# Altium PCB Light Sensor Prototype.PcbDoc
Units mm, origin at the board's own origin, x right, y up, seen from the top; angles counter-clockwise.
Board outline 39.25 x 39.25 mm, 2 copper layers (Top Layer, Bottom Layer); 41 components, 35 nets, 224 pads, 62 vias.
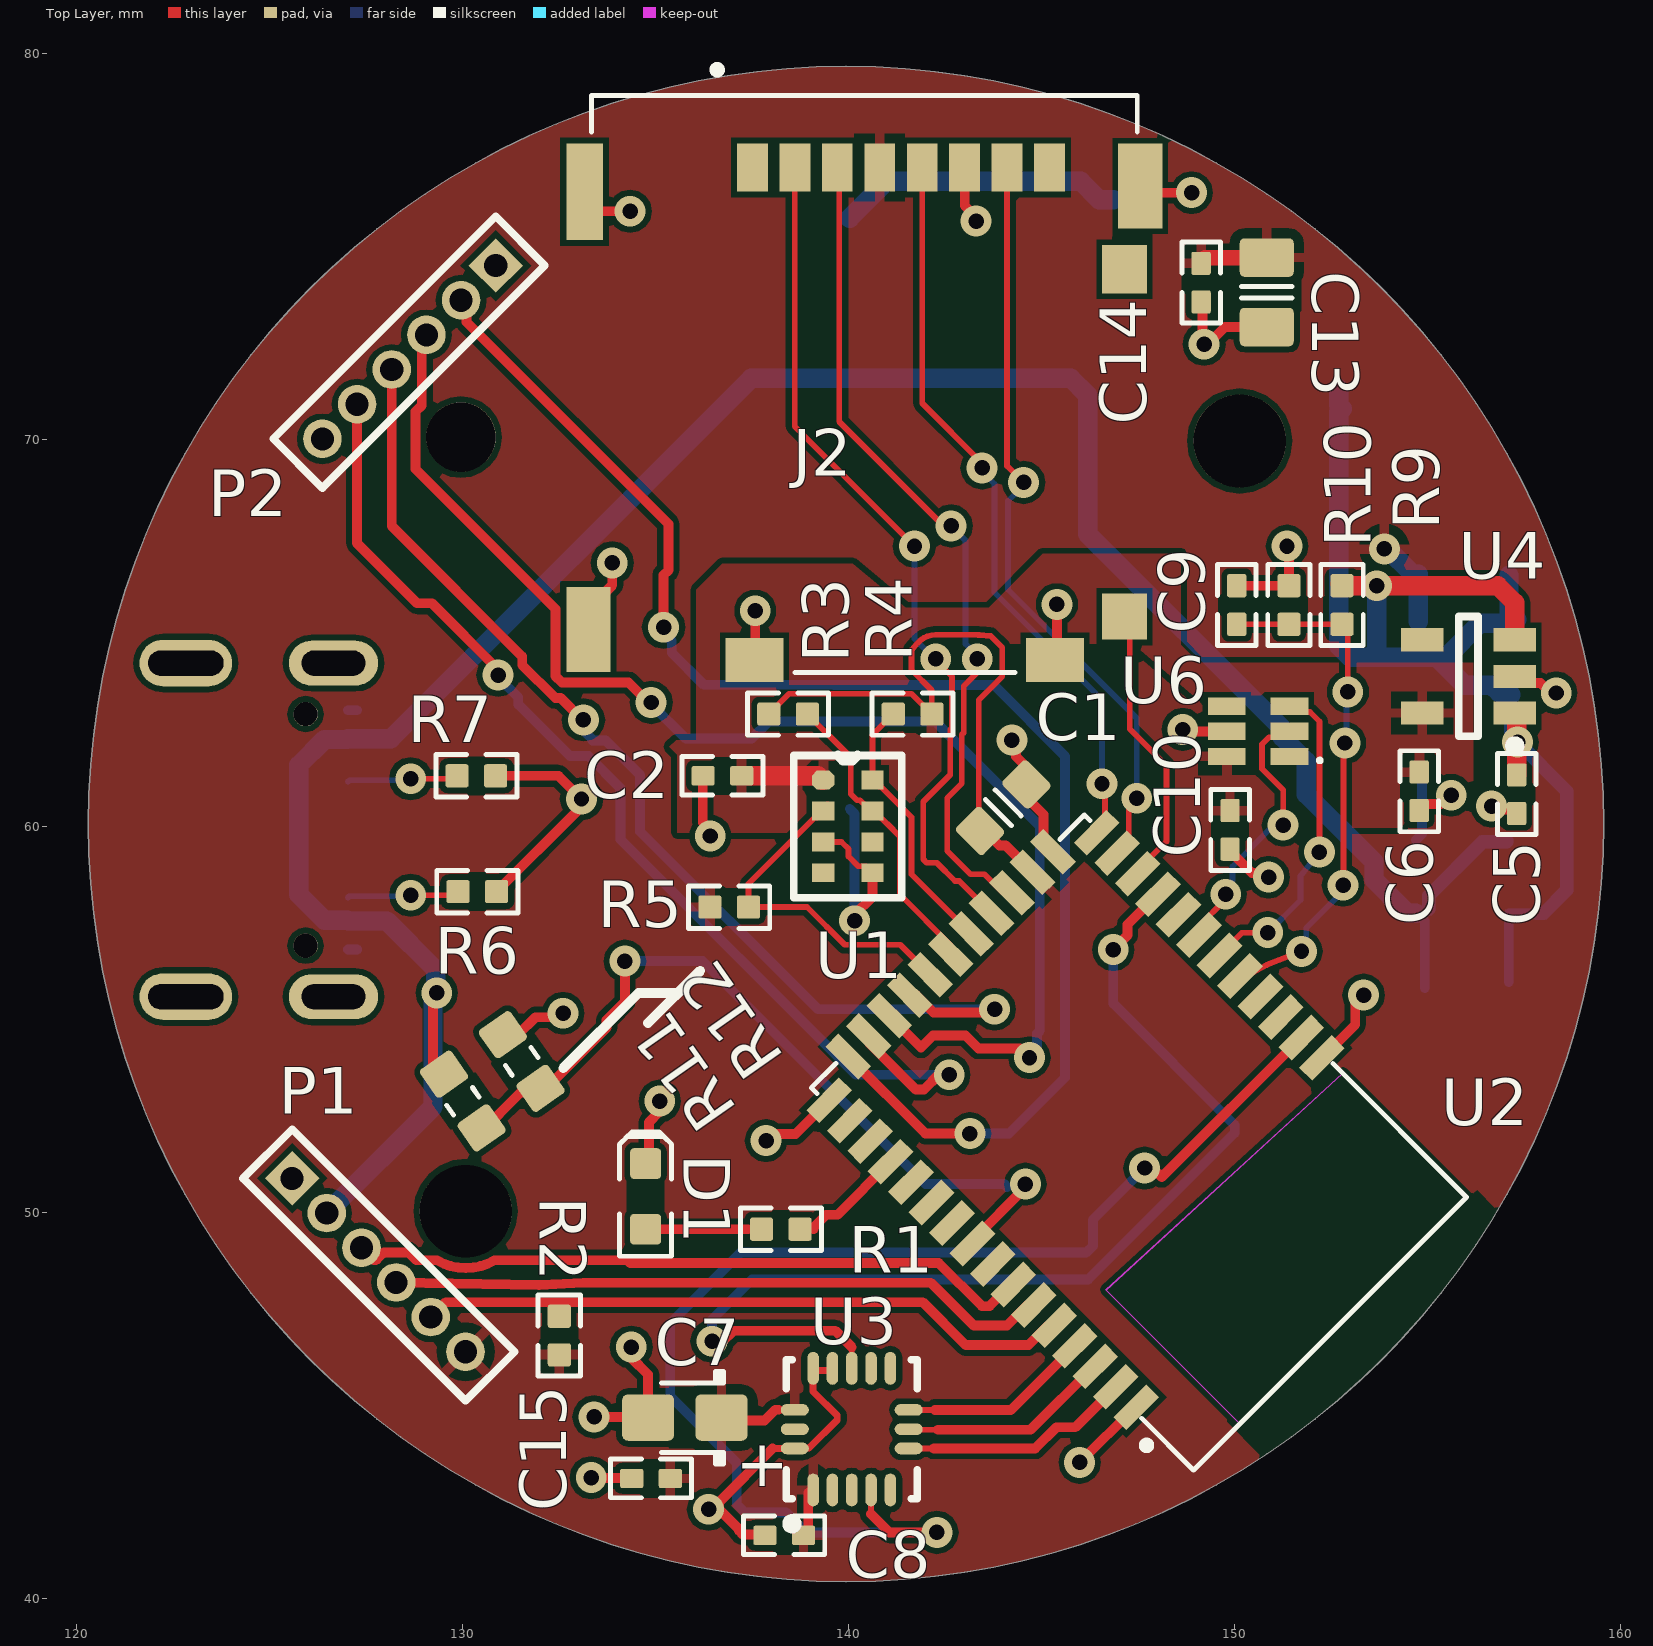
[diagram p0: Top Layer view]
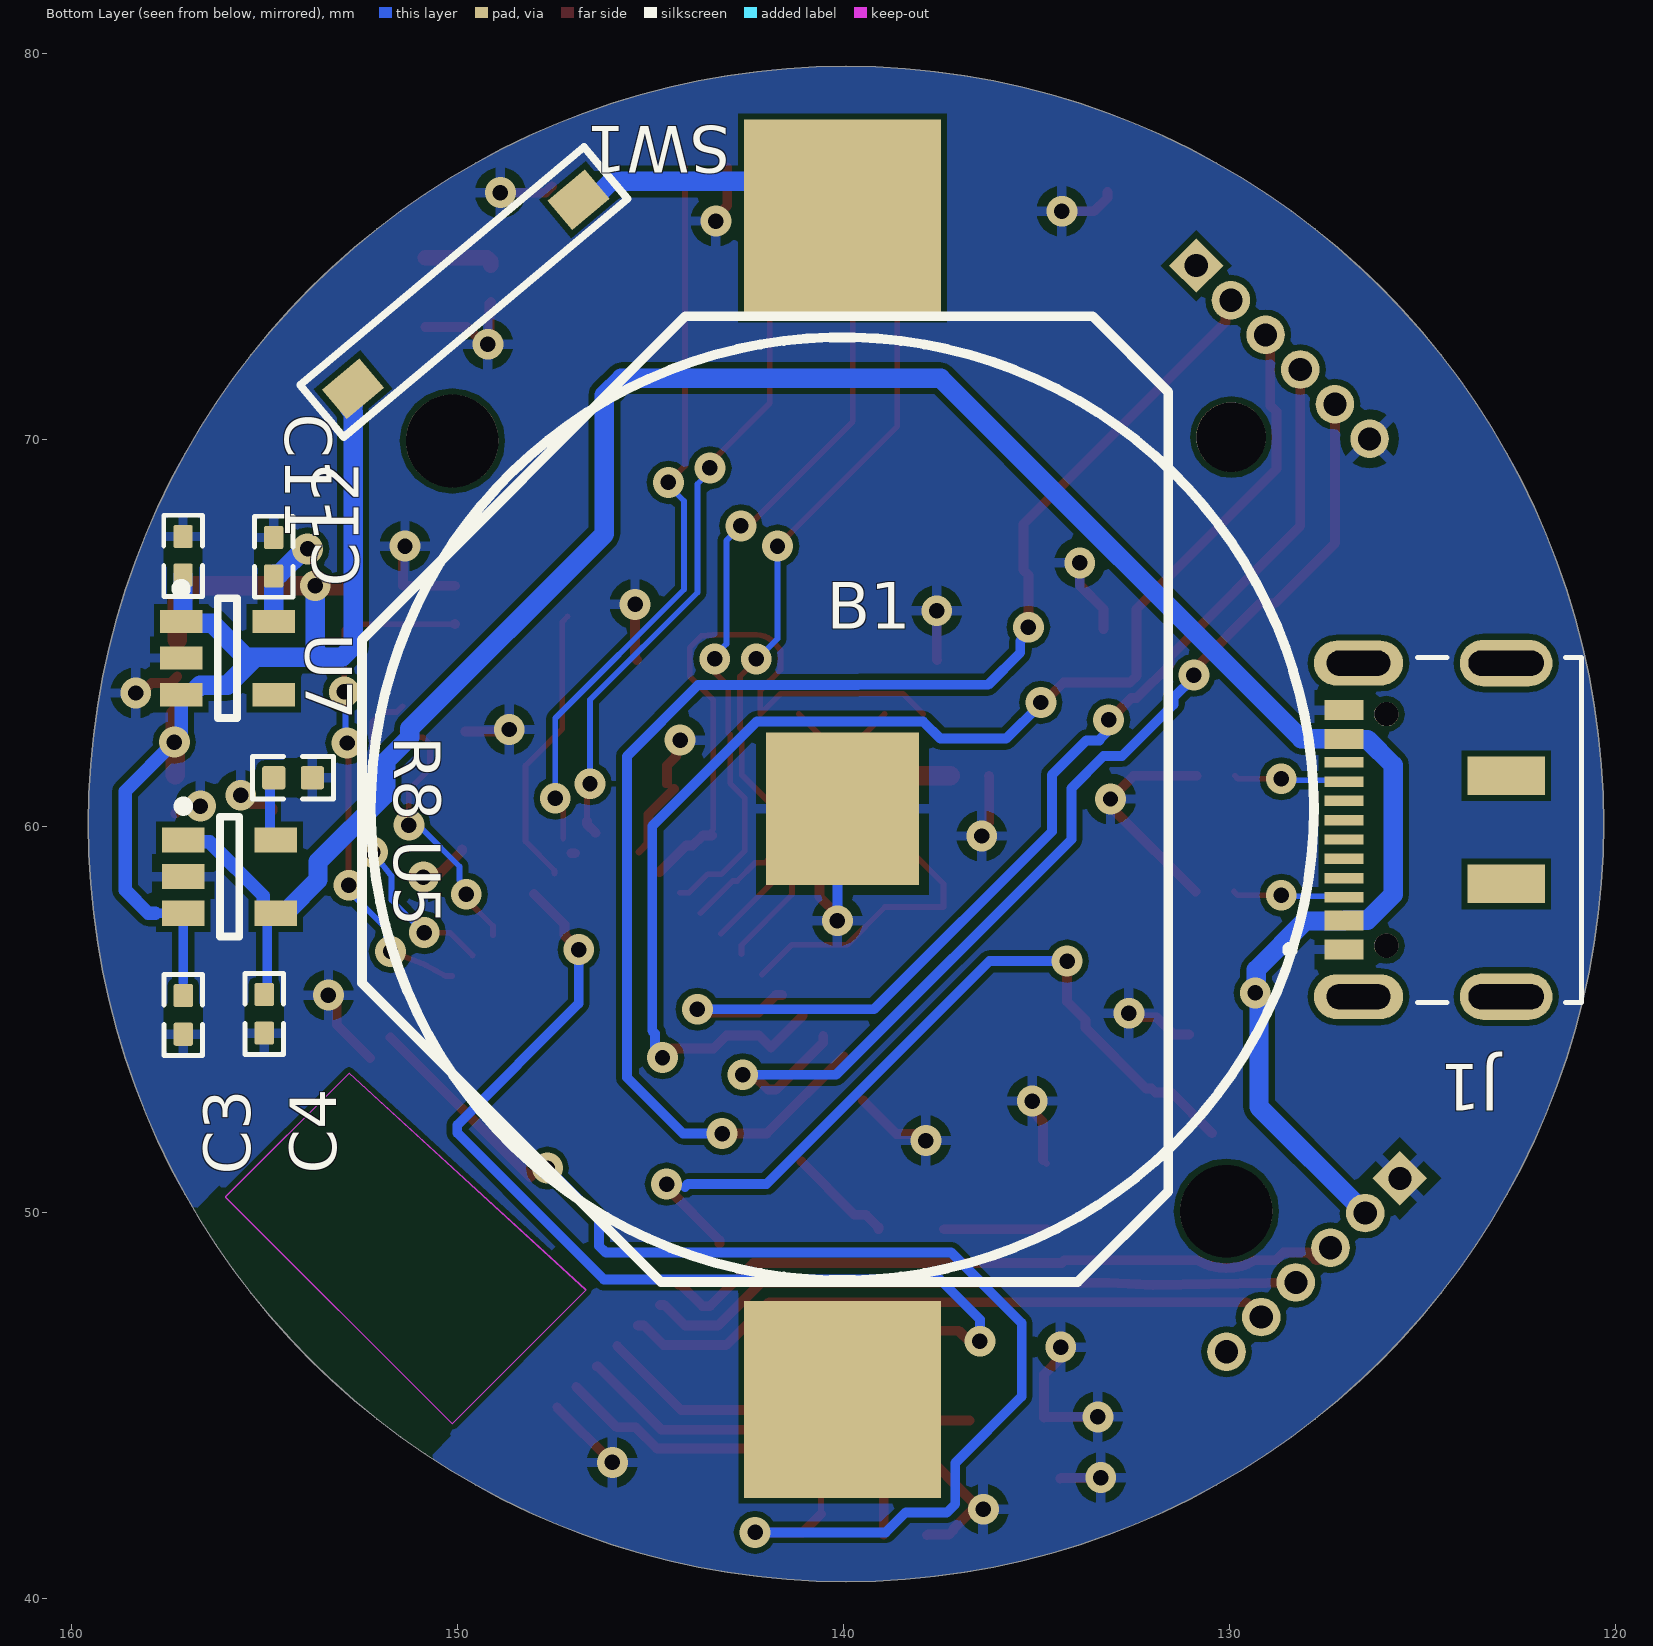
[diagram p1: Bottom Layer view, seen from below]
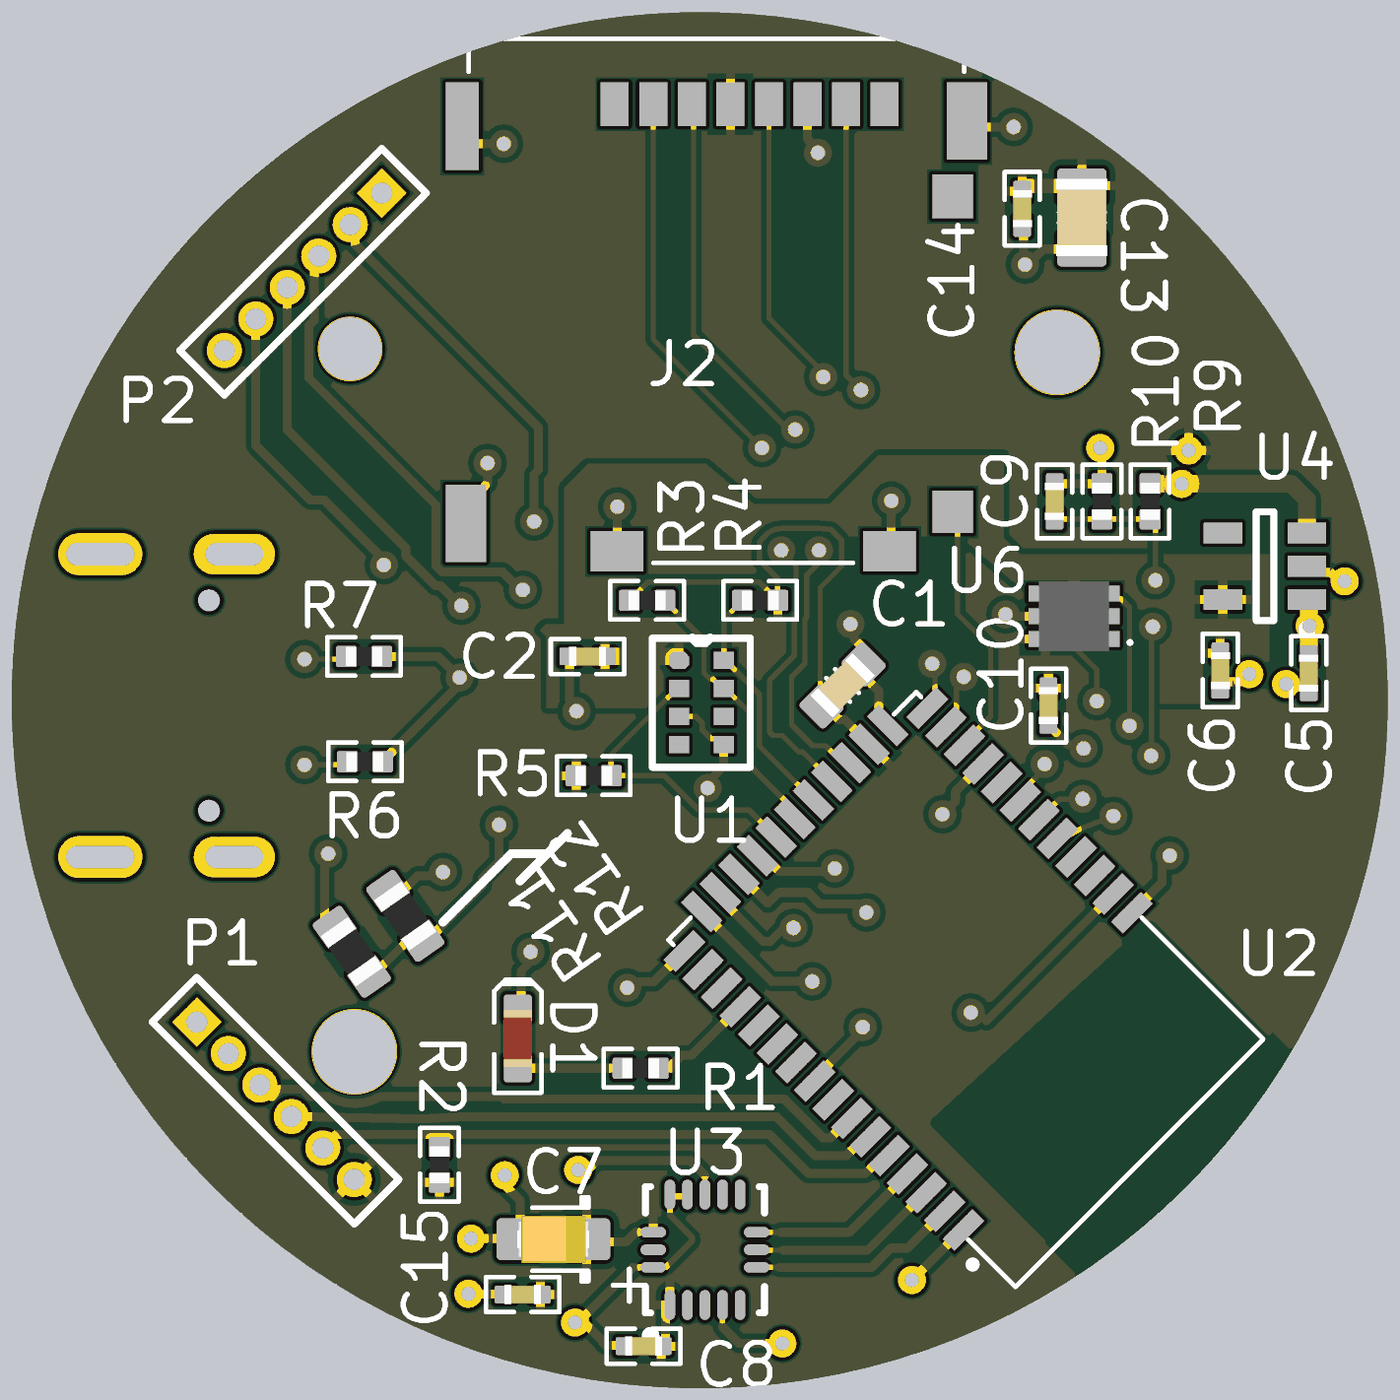
[diagram p2: 3D render of the assembled board from above, using the file's embedded part models]
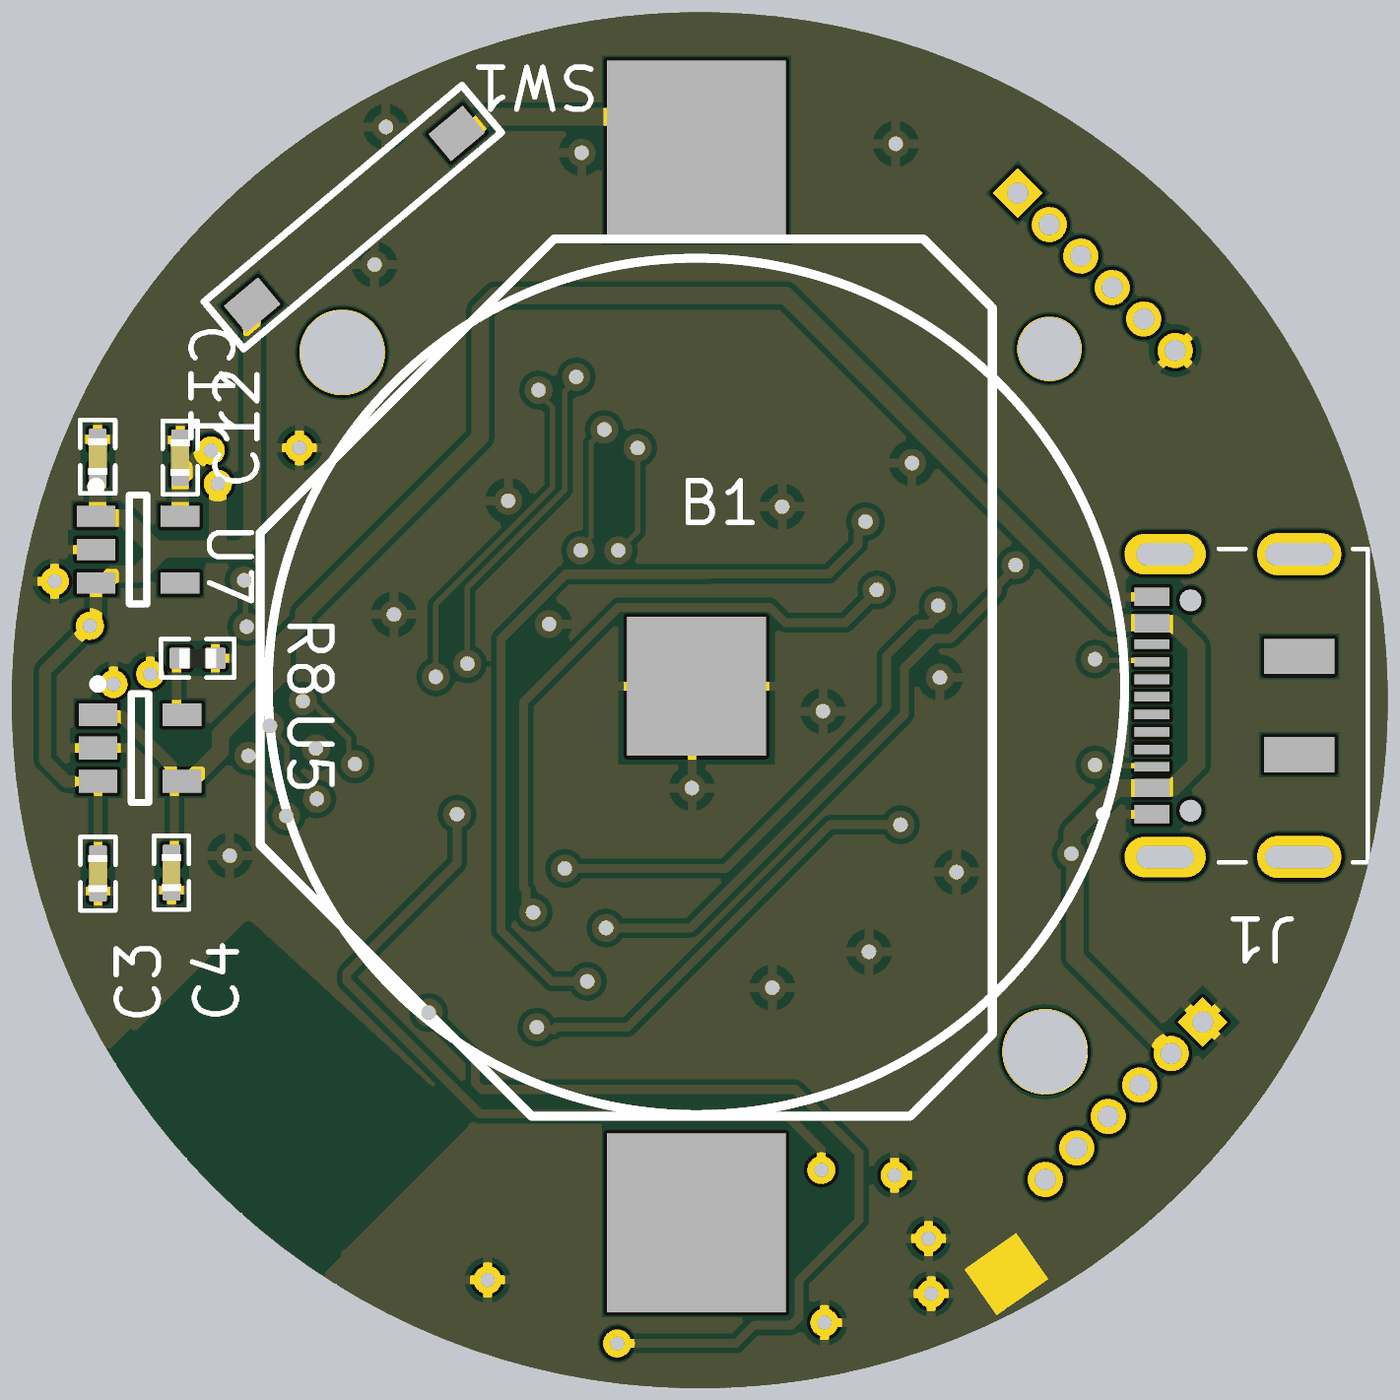
[diagram p3: 3D render of the assembled board from below, using the file's embedded part models]

## Layer stack, top to bottom
Top Solder: solder mask 0.0102, Solder Resist, Dk 3.5
Top Layer: signal copper 0.0356
Dielectric 1: dielectric 0.32, FR-4, Dk 4.8
Bottom Layer: signal copper 0.0356
Bottom Solder: solder mask 0.0102, Solder Resist, Dk 3.5

## Board outline
120.299,60.052 ccw(c139.926,60.052) 139.926,40.425 ccw(c139.926,60.052) 159.553,60.052 ccw(c139.926,60.052) 139.926,79.679 ccw(c139.926,60.052)

## Design rules (kind name [scope] priority, off if disabled: settings)
Clearance [All] p1: gap=0.15 ignorepadtopadclearanceinfootprint=FALSE except(0: Arc-Hole Track-Hole SMDPad-Hole THPad-Hole Via-Hole Fill-Hole Poly-Hole Region-Hole Text-Hole)
ComponentClearance ComponentClearance_1 [All] p1 off: gap=0.254 collisioncheckmode=3 verticalgap=0.254 showdistances=FALSE
ComponentClearance ComponentClearance_2 [InComponent('B1')] p2 off: gap=0 collisioncheckmode=3 verticalgap=0 showdistances=FALSE
ComponentClearance [InComponent('B1') vs InComponent('SW1')] p3 off: gap=0 collisioncheckmode=3 verticalgap=0 showdistances=FALSE
MinimumSolderMaskSliver [All] p1: minsoldermaskwidth=0.15
PolygonConnect [All] p1: connectstyle=Relief reliefconductorwidth=0.254 reliefentries=4 polygonreliefangle="90 Angle" airgapwidth=0.254
RoutingVias [All] p1: holewidth=0.711 width=1.27 viastyle="Through Hole" minholewidth=0.711 minwidth=1.27 maxholewidth=0.711 maxwidth=1.27
SilkToSolderMaskClearance [IsPad] p1: minsilkscreentomaskgap=0.15 clearancetoexposedcopper=TRUE
SolderMaskExpansion [All] p1: expansion=0.102 istentingtop=FALSE
Width [All] p1: maxlimit=0.5 minlimit=0.15 preferedwidth=0.254 minimp=50.000000 maximp=50.000000 favimp=50.000000
27 further rules are at their usual default settings.

## Classes and differential pairs
component class sheet3_memory: C13 C14 J2
component class sheet1_mcu_radio: C1 D1 P1 P2 R1 R2 U2
component class sheet4_power: B1 C3 C4 C5 C6 C9 C11 C12 R6 R7 R8 R9 R10 R11 R12 SW1 U4 U5 U7
component class sheet2_sensors: C2 C7 C8 C10 C15 R3 R4 R5 U1 U3 U6

## Components (designator, comment, footprint, x,y, rotation, side; value= is the part's Value field where it differs from the comment)
B1 "2450 Cell Holder" BC-2404 140.021,75.747 r270 bottom locked
C1 "approved sub OK" CAPC1608X90N 144,60.475 r45 top value=1uF
C2 "100n" CAPC1005X55N 136.725,61.3 r180 top
C3 "1u" CAPC1005X55N 157.093,55.107 r270 bottom
C4 "1u" CAPC1005X55N 154.996,55.134 r270 bottom
C5 "1u" CAPC1005X55N 157.3,60.825 r270 top
C6 "4.7u" CAPC1005X55N 154.775,60.9 r270 top
C7 "1µ" CAPMP2012X150USR 135.75,44.675 r180 top
C8 "100n" CAPC1005X55N 138.325,41.625 r180 top
C9 "100n" CAPC1005X55N 150.05,65.725 r90 top
C10 "100n" CAPC1005X55N 149.875,59.9 r270 top
C11 "1u" CAPC1005X55N 157.1,67 r90 bottom
C12 "4.7u" CAPC1005X55N 154.75,66.975 r90 bottom
C13 "approved sub OK" CAPC2012X135N 150.825,73.825 r270 top value=10µ
C14 "100n" CAPC1005X55N 149.125,74.075 r270 top
C15 "100n" CAPC1005X55N 134.875,43.1 r180 top
D1 "Red" LED-0603-RED 134.735,50.405 r90 top
J1 "DX07S016JA1R1500" JAE_DX07S016JA1R1500 125.925,59.9 r90 bottom
J2 "503182-1852" MOLEX_503182-1852 140.4,70.7 r0 top
P1 "MHDR1X6" MHDR1X6 125.579,50.871 r315 top
P2 "MHDR1X6" MHDR1X6 130.853,74.519 r225 top
R1 "Thick Film" RESC1005X40N 138.238,49.555 r0 top value=20
R2 "Thick Film" RESC1005X40N 132.5,46.8 r90 top value=100K
R3 "Thick Film" RESC1005X40N 138.425,62.9 r0 top value=10K
R4 "Thick Film" RESC1005X40N 141.65,62.9 r180 top value=10K
R5 "Thick Film" RESC1005X40N 136.9,57.9 r0 top value=10K
R6 "Thick Film" RESC1005X40N 130.375,58.3 r0 top value=5k1
R7 "Thick Film" RESC1005X40N 130.35,61.3 r0 top value=5k1
R8 "Thick Film" RESC1005X40N 154.25,61.25 r180 bottom value=20k
R9 "Thick Film" RESC1005X40N 152.775,65.725 r270 top value=2.4M
R10 "Thick Film" RESC1005X40N 151.4,65.725 r90 top value=7.5M
R11 "Thick Film" RESC1608X55N 130,52.875 r305 top value=33k
R12 "Thick Film" RESC1608X55N 131.525,53.9 r125 top value=68k
SW1 "SW_1WAY_DIP" SW_1WAY 149.775,73.775 r320 bottom
U1 "AS7341" OLGA8 139.335,61.189 r0 top
U2 "BL652" BL652 147.515,51.801 r225 top
U3 "ADXL362BCCZ-R2" ADI-CC-16-4_N 140.075,44.375 r90 top
U4 "TPS76318DBVT" TI-DBV5_N 156.05,63.875 r180 top
U5 "MCP73812T-420I/OT" SOT-23-OT5_N 155.894,58.689 r180 bottom
U6 "MAX31889ALT+" MAX31889ALT 150.6,62.45 r180 top
U7 "TPS76333DBVT" TI-DBV5_N 155.95,64.35 r180 bottom

## Footprints (in the part's own frame and the unit in brackets; to place one, negate y for a bottom-side part, rotate by r counter-clockwise, add the part's x,y. Pads: shape width x height; smd on the part's side, far side on the other; paste and mask are expansions set on the pad)
ADI-CC-16-4_N [mm] "QFN, 16-Leads, Body 3.25x3mm, Pitch 0.5mm, IPC Medium Density"
  oval 0.85x0.3 smd: 1(-1.575,1) 2(-1.575,0.5) 3(-1.575,0) 4(-1.575,-0.5) 5(-1.575,-1) 9(1.575,-1) 10(1.575,-0.5) 11(1.575,0) 12(1.575,0.5) 13(1.575,1)
  oval 0.3x0.725 smd: 6(-0.5,-1.475) 7(0,-1.475) 8(0.5,-1.475) 14(0.5,1.475) 15(0,1.475) 16(-0.5,1.475)
  silkscreen extent -2.57,-1.7 1.8,1.7, body extent -1.65,-1.55 1.65,1.55, height 1.14
BC-2404 [mm]
  rect 5.1x5.1 smd: 1(30.6,0) 3(0,0)
  rect 3.96x3.96 smd: 2(15.3,0)
  silkscreen extent 2.54,-12.45 27.56,12.22
BL652 [mm]
  rect 1.2x0.48 smd: 1(4.9,4.8) 2(4.9,4.05) 3(4.9,3.3) 4(4.9,2.55) 5(4.9,1.8) 6(4.9,1.05) 7(4.9,0.3) 8(4.9,-0.45) 9(4.9,-1.2) 10(4.9,-1.95) 11(4.9,-2.7) 12(4.9,-3.45) 13(4.9,-4.2) 14(4.9,-4.95) 15(4.9,-5.7) 16(4.9,-6.45) 28(-4.9,-6.45) 29(-4.9,-5.7) 30(-4.9,-4.95) 31(-4.9,-4.2) 32(-4.9,-3.45) 33(-4.9,-2.7) 34(-4.9,-1.95) 35(-4.9,-1.2) 36(-4.9,-0.45) 37(-4.9,0.3) 38(-4.9,1.05) 39(-4.9,1.8)
  rect 0.48x1.2 smd: 17(3.75,-6.9) 18(3,-6.9) 19(2.25,-6.9) 20(1.5,-6.9) 21(0.75,-6.9) 22(0,-6.9) 23(-0.75,-6.9) 24(-1.5,-6.9) 25(-2.25,-6.9) 26(-3,-6.9) 27(-3.75,-6.9)
  Keep-Out Layer region: 3.302,2.101 -5.004,2.465 -5.004,7 3.302,7
  Keep-Out Layer region: 3.302,2.092 -5.006,2.465 -5.006,7 3.302,7
  silkscreen extent -5,-7 5.51,7
CAPC1005X55N [mm] "Chip Capacitor, Body 1.0x0.5mm, EIA 0402, IPC Medium Density"
  round 0.2 on Mech15: 0(0,0)
  rrect20% 0.6x0.5 smd: 1(-0.5,0) 2(0.5,0)
  Top Layer pour cut-out: -0.325,0.375 -0.2,0.5 0.2,0.5 0.325,0.375 0.325,-0.375 0.2,-0.5 -0.2,-0.5 -0.325,-0.375
  silkscreen extent -1.05,-0.5 1.05,0.5, body extent -0.52,-0.27 0.53,0.28, height 0.55
CAPC1608X90N [mm] "Chip Capacitor, Body 1.6x0.8mm, EIA 0603, IPC Medium Density"
  round 0.254 on Mech15: 0(0,0)
  rrect25% 0.9x1 smd: 1(-0.85,0) 2(0.85,0)
  Top Layer pour cut-out: -0.6,0.5 -0.4,0.7 0.4,0.7 0.6,0.5 0.6,-0.5 0.4,-0.7 -0.4,-0.7 -0.6,-0.5
  silkscreen extent -0.18,-0.48 0.18,0.48, body extent -0.85,-0.45 0.85,0.45, height 0.89
CAPC2012X135N [mm] "Chip Capacitor, Body 2.0x1.2mm, EIA 0805, IPC Medium Density"
  round 0.254 on Mech15: 0(0,0)
  rrect25% 1x1.4 smd: 1(-0.9,0) 2(0.9,0)
  Top Layer pour cut-out: -0.675,0.7 -0.475,0.9 0.475,0.9 0.675,0.7 0.675,-0.7 0.475,-0.9 -0.475,-0.9 -0.675,-0.7
  silkscreen extent -0.15,-0.65 0.15,0.65, body extent -1.1,-0.72 1.1,0.73, height 1.34
CAPMP2012X150USR [mm] "Molded body capacitor, Body 2.0x1.2mm, 0805, IPC Medium Density"
  round 0.254 on Mech15: 0(0,0)
  rrect25% 1.35x1.2 smd: 1(-0.95,0) 2(0.95,0)
  Top Layer pour cut-out: -0.4,0.8 0.4,0.8 0.4,-0.8 -0.4,-0.8
  silkscreen extent -1,-1.2 0.6,1.2, body extent -1.02,-0.67 1.03,0.68, height 1.5
JAE_DX07S016JA1R1500 [mm]
  rect 0.52x1 smd: 1(-3.1,1.1) 2(-2.35,1.1) 11(2.35,1.1) 12(3.1,1.1)
  rect 0.27x1 smd: 3(-1.75,1.1) 4(-1.25,1.1) 5(-0.75,1.1) 6(-0.25,1.1) 7(0.25,1.1) 8(0.75,1.1) 9(1.25,1.1) 10(1.75,1.1)
  rect 1x2 smd: S1(-1.4,-3.1) S2(1.4,-3.1)
  oval 1.158x2.316 hole 0.65 slot 1.65 at 90 deg: S3(-4.32,0.725) S4(4.32,0.725)
  oval 1.2x2.4 hole 0.65 slot 1.95 at 90 deg: S5(-4.32,-3.1) S6(4.32,-3.1)
  round 0.63 hole 0.63 unplated: ""(-3,0) ""(3,0)
  round 0.6 hole 0.6 unplated: ""(3,0)
  silkscreen extent -4.47,-5.05 4.47,2.6
LED-0603-RED [mm]
  round 0.254 on Mech15: 0(0,0)
  rrect25% 0.8x0.8 smd: A(-0.85,0) K(0.85,0)
  Top Layer pour cut-out: -0.5,0.5 0.5,0.5 0.5,-0.5 -0.5,-0.5
  silkscreen extent -1.55,-0.67 1.68,0.67, body extent -0.8,-0.4 0.8,0.4, height 0.75
MAX31889ALT [mm]
  rect 0.975x0.45 smd: 1(-0.813,0.65) 2(-0.813,0) 3(-0.813,-0.65) 4(0.813,-0.65) 5(0.813,0) 6(0.813,0.65)
  silkscreen extent -1.65,0.7 -1.55,0.8, body extent -1,-1 1,1, height 0.9
MHDR1X6 [mm] "Connector; Header; 6 Position"
  rect 1x1 hole 0.6: 1(0,0)
  round 1 hole 0.6: 2(1.27,0) 3(2.54,0) 4(3.81,0) 5(5.08,0) 6(6.35,0)
  silkscreen extent -0.9,-0.9 7.25,0.9
MOLEX_503182-1852 [mm]
  rect 0.8x1.24 smd: 1(-2.9,6.355) 2(-1.8,6.355) 3(-0.7,6.355) 4(0.4,6.355) 5(1.5,6.355) 6(2.6,6.355) 7(3.7,6.355) 8(4.8,6.355)
  rect 1.16x1.2 smd: DT(6.74,-5.275)
  rect 0.95x2.5 smd: P1(-7.245,5.725)
  rect 1.15x2.2 smd: P2(7.145,5.875) P3(-7.145,-5.605)
  rect 1.5x1.15 smd: P4(-2.84,-6.4) P5(4.94,-6.4)
  rect 1.16x1.25 smd: SW(6.74,3.725)
  silkscreen extent -7.07,-6.73 7.07,8.99
OLGA8 [mm]
  oct 0.575x0.488 smd: 1(0,0)
  rect 0.575x0.488 smd: 2(0,-0.8) 3(0,-1.6) 4(0,-2.4) 5(1.276,-2.4) 6(1.276,-1.6) 7(1.276,-0.8) 8(1.276,0)
  silkscreen extent -0.76,-3.05 2.03,0.64
RESC1005X40N [mm] "Chip Resistor, Body 1.0x0.5mm, EIA 0402, IPC Medium Density"
  round 0.2 on Mech15: 0(0,0)
  rrect20% 0.6x0.6 smd: 1(-0.5,0) 2(0.5,0)
  Top Layer pour cut-out: -0.325,0.375 -0.2,0.5 0.2,0.5 0.325,0.375 0.325,-0.375 0.2,-0.5 -0.2,-0.5 -0.325,-0.375
  silkscreen extent -1.05,-0.55 1.05,0.55, body extent -0.52,-0.27 0.53,0.28, height 0.4
RESC1608X55N [mm] "Chip Resistor, Body 1.6x0.8mm, EIA 0603, IPC Medium Density"
  round 0.254 on Mech15: 0(0,0)
  rrect25% 0.9x1 smd: 1(-0.85,0) 2(0.85,0)
  Top Layer pour cut-out: -0.6,0.5 -0.4,0.7 0.4,0.7 0.6,0.5 0.6,-0.5 0.4,-0.7 -0.4,-0.7 -0.6,-0.5
  silkscreen extent -0.15,-0.41 0.15,0.41, body extent -0.87,-0.47 0.88,0.48, height 0.54
SOT-23-OT5_N [mm] "SOT23, 5-Leads, Body 2.9x1.6mm, Pitch 0.95mm, Lead Span 2.7mm, IPC Medium Density"
  rect 1.1x0.65 smd: 1(-1.2,0.95) 2(-1.2,0) 3(-1.2,-0.95) 4(1.2,-0.95) 5(1.2,0.95)
  silkscreen extent -1.33,-1.55 0.25,1.95, body extent -0.9,-1.55 0.9,1.55, height 1.45
SW_1WAY [mm]
  rect 1.27x1 smd: 1(-3.81,0) 2(3.81,0)
  silkscreen extent -4.8,-0.96 4.8,0.8
TI-DBV5_N [mm] "SOT23, 5-Leads, Body 2.9x1.6mm, Pitch 0.95mm, IPC Medium Density"
  rect 1.1x0.6 smd: 1(-1.2,0.95) 2(-1.2,0) 3(-1.2,-0.95) 4(1.2,-0.95) 5(1.2,0.95)
  silkscreen extent -1.33,-1.55 0.25,1.92, body extent -0.87,-1.52 0.87,1.53, height 1.45

## Part data
B1: library part 2450-LiIon, "Multicomp BC-2404"
C1: library part CAPC_100n_0603_X7R_50V_10%, "Capacitor SMD Cer 10uF 10% 16V X5R 0603", Manufacturer=TDK, Manufacturer Part Number=C1608X5R1C106M080AB, Package / Case="0603 (1608 Metric)", Ratings="16V; X5R", Supplier Part Number=2525096, Tolerance=±10%, Material=ceramic, Supplier=Farnell, Supplier Link=https://uk.farnell.com/tdk/c1608x5r1c106m080ab/cap-10-f-16v-20-x5r-0603/dp/2525096?st=2521959
C2 C8 C9 C10 C14 C15: library part CAPC_100n_0402_X5R_16V_10%, "Capacitor SMD Cer 100nF 10% 16V X5R 0402", Manufacturer 1="AVX Corporation", Manufacturer 2=Yageo, Manufacturer Part Number 1=0402YD104KAT2A, Manufacturer Part Number 2=CC0402KRX5R7BB104, Operating Temperature="-55°C ~ 125°C", Package / Case="0402 (1005 Metric)", Ratings="16V; X5R", Supplier Part Number 1=478-1126-1-ND, Tolerance=±10%, ComponentLink1Description=http://www.avx.com/docs/Catalogs/cx5r.pdf, ComponentLink1URL=http://www.avx.com/docs/Catalogs/cx5r.pdf, ComponentLink2Description=http://www.yageo.com/documents/recent/UPY-GPHC_X5R_4V-to-50V_12.pdf, ComponentLink2URL=http://www.yageo.com/documents/recent/UPY-GPHC_X5R_4V-to-50V_12.pdf, SCDType=spec, Size / Dimension="0.039\" L x 0.020\" W (1.00mm x 0.50mm)", Supplier 1=Digi-Key, Supplier 2=Digi-Key, Supplier Part Number 2=311-1347-1-ND
C3 C4 C5 C11: library part CAPC_100n_0402_X5R_16V_10%, "Capacitor SMD Cer 1uF 10% 16V X5R 0402", Manufacturer 1="AVX Corporation", Manufacturer 2=Yageo, Manufacturer Part Number 1=0402YD104KAT2A, Manufacturer Part Number 2=CC0402KRX5R7BB104, Operating Temperature="-55°C ~ 125°C", Package / Case="0402 (1005 Metric)", Ratings="16V; X5R", Supplier Part Number 1=478-1126-1-ND, Tolerance=±10%, ComponentLink1Description=http://www.avx.com/docs/Catalogs/cx5r.pdf, ComponentLink1URL=http://www.avx.com/docs/Catalogs/cx5r.pdf, ComponentLink2Description=http://www.yageo.com/documents/recent/UPY-GPHC_X5R_4V-to-50V_12.pdf, ComponentLink2URL=http://www.yageo.com/documents/recent/UPY-GPHC_X5R_4V-to-50V_12.pdf, SCDType=spec, Size / Dimension="0.039\" L x 0.020\" W (1.00mm x 0.50mm)", Supplier 1=Digi-Key, Supplier 2=Digi-Key, Supplier Part Number 2=311-1347-1-ND
C6 C12: library part CAPC_100n_0402_X5R_16V_10%, "Capacitor SMD Cer 4.7uF 10% 16V X5R 0402", Manufacturer 1="AVX Corporation", Manufacturer 2=Yageo, Manufacturer Part Number 1=0402YD104KAT2A, Manufacturer Part Number 2=CC0402KRX5R7BB104, Operating Temperature="-55°C ~ 125°C", Package / Case="0402 (1005 Metric)", Ratings="16V; X5R", Supplier Part Number 1=478-1126-1-ND, Tolerance=±10%, ComponentLink1Description=http://www.avx.com/docs/Catalogs/cx5r.pdf, ComponentLink1URL=http://www.avx.com/docs/Catalogs/cx5r.pdf, ComponentLink2Description=http://www.yageo.com/documents/recent/UPY-GPHC_X5R_4V-to-50V_12.pdf, ComponentLink2URL=http://www.yageo.com/documents/recent/UPY-GPHC_X5R_4V-to-50V_12.pdf, SCDType=spec, Size / Dimension="0.039\" L x 0.020\" W (1.00mm x 0.50mm)", Supplier 1=Digi-Key, Supplier 2=Digi-Key, Supplier Part Number 2=311-1347-1-ND
C7: library part CAPT_1u_0805_10V, "Capacitor SMD Tantalum 1uF 20% 10V 0805", ESR (Equivalent Series Resistance)="6.000 Ohm", Manufacturer 1="AVX Corporation", Manufacturer Part Number 1=TAJP106M010RNJ, Manufacturer Size Code=P, Operating Temperature="-55°C ~ 125°C", Package / Case="0805 (2012 metric)", Ratings=10V, Supplier Part Number 1=478-3281-1-ND, Tolerance=±20%, ComponentLink1Description=http://www.avx.com/docs/Catalogs/tajlp.pdf, ComponentLink1URL=http://www.avx.com/docs/Catalogs/tajlp.pdf, Height - Seated (Max)="0.059\" (1.50mm)", Material=Tantalum, SCDType=spec, Size / Dimension="0.081\" L x 0.053\" W (2.05mm x 1.35mm)", Supplier 1=Digi-Key, Type=Molded
C13: library part CAPC_10u_0805_10V, "Capacitor SMD Cer 10uF 10% 10V X5R 0805", Manufacturer 1="AVX Corporation", Manufacturer 2=Kemet, Manufacturer Part Number 1=0805ZD106KAT2A, Manufacturer Part Number 2=C0805C106K8PACTU, Package / Case="0805 (2012 metric)", Ratings="10V; X5R", Supplier Part Number 1=478-5167-1-ND, Tolerance=±10%, ComponentLink1Description=http://www.avx.com/docs/Catalogs/cx5r.pdf, ComponentLink1URL=http://www.avx.com/docs/Catalogs/cx5r.pdf, ComponentLink2Description=http://www.kemet.com/datasheets&C0805C106K8PACTU, ComponentLink2URL=http://www.kemet.com/datasheets&C0805C106K8PACTU, Material=ceramic, SCDType=spec, Supplier 1=Digi-Key, Supplier 2=Digi-Key, Supplier Part Number 2=399-4925-1-ND
D1: library part LED_SMD_Red_0603_220mcd, "Dialight 598-8E40-107F", Manufacturer 1="Kingbright Company LLC", Manufacturer Part Number 1=APT1608SURCK, Package / Case="0603 (1608 metric)", Ratings="220 mcd; 630 nm", Supplier Part Number 1=754-1123-1-ND, Voltage - Forward (Vf) @ 10mA=1.9V, Voltage - Forward (Vf) Typ=1.95V, ComponentLink1Description=http://www.us.kingbright.com/images/catalog/SPEC/APT1608SURCK.pdf, ComponentLink1URL=http://www.us.kingbright.com/images/catalog/SPEC/APT1608SURCK.pdf, Material="AlGaInP on GaAs", SCDType=source, Supplier 1=Digi-Key
J1: "USB-C (USB TYPE-C) USB 2.0 Receptacle Connector 24 (16+8 Dummy) Position Surface Mount, Right Angle; Through Hole", Package=None, Availability=Unavailable, DigiKey-Purchase-URL=https://snapeda.com/shop?store=DigiKey&id=4551013, MF="JAE Electronics", MP=DX07S016JA1R1500, Price=None, SnapEDA_Link=https://www.snapeda.com/parts/DX07S016JA1R1500/JAE%20Electronics/view-part/4551013/?ref=snap
J2: "10 _8 + 2_ Position Card Connector microSDâ„¢ Surface Mount, Right Angle Gold", Package=None, Digi-Key_Part_Number=WM12834CT-ND, Digi-Key_Purchase_URL=https://www.digikey.com.tr/product-detail/en/molex/5031821852/WM12834CT-ND/5823232?utm_source=snapeda&utm_medium=aggregator&utm_campaign=symbol, MF=Molex, MP=5031821852, SnapEDA_Link=https://www.snapeda.com/parts/5031821852/Molex/view-part/46835/?ref=snap
P1 P2: "Header, 6-Pin", LatestRevisionDate=17-Jul-2002, LatestRevisionNote="Re-released for DXP Platform.", Publisher="Altium Limited"
R1 R2: library part RES_100K_0402_5%, "Resistor SMD chip 100k Ohm 0.063W 5% 0402", Manufacturer 1="Vishay Dale", Manufacturer 2=Yageo, Manufacturer Part Number 1=CRCW0402100KJNED, Manufacturer Part Number 2=RC0402JR-07100KL, Package / Case="0402 (1005 Metric)", Ratings="1/16 W", Supplier Part Number 1=541-100KJCT-ND, Tolerance=±5%, ComponentLink1Description=http://www.vishay.com/doc?20035, ComponentLink1URL=http://www.vishay.com/doc?20035, ComponentLink2Description=http://www.yageo.com/documents/recent/PYu-RC0402_51_RoHS_L_6.pdf, ComponentLink2URL=http://www.yageo.com/documents/recent/PYu-RC0402_51_RoHS_L_6.pdf, SCDType=undef, Supplier 1=Digi-Key, Supplier 2=Digi-Key, Supplier Part Number 2=311-100KJRCT-ND
R3 R4 R5: library part RES_10K_0402_5%, "Resistor SMD chip 10k Ohm 0.063W 5% 0402", Manufacturer 1="Vishay Dale", Manufacturer 2=Yageo, Manufacturer Part Number 1=CRCW040210K0FKED, Manufacturer Part Number 2=RC0402JR-0710KL, Package / Case="0402 (1005 Metric)", Ratings="1/16 W", Supplier Part Number 1=541-10.0KLCT-ND, Tolerance=±5%, ComponentLink1Description=http://www.vishay.com/doc?20035, ComponentLink1URL=http://www.vishay.com/doc?20035, ComponentLink2Description=http://www.yageo.com/documents/recent/PYu-RC0402_51_RoHS_L_6.pdf, ComponentLink2URL=http://www.yageo.com/documents/recent/PYu-RC0402_51_RoHS_L_6.pdf, SCDType=undef, Supplier 1=Digi-Key, Supplier 2=Digi-Key, Supplier Part Number 2=311-10KJRCT-ND
R6 R7: library part RES_3K3_0402_5%, "Resistor SMD chip 5.1k Ohm 0.063W 5% 0402", Manufacturer 1=Yageo, Manufacturer Part Number 1=RC0402JR-073K3L, Package / Case="0402 (1005 metric)", Ratings="1/16 W", Supplier Part Number 1=311-3.3KJRCT-ND, Tolerance=±5%, ComponentLink1Description=http://www.yageo.com/documents/recent/PYu-RC0402_51_RoHS_L_6.pdf, ComponentLink1URL=http://www.yageo.com/documents/recent/PYu-RC0402_51_RoHS_L_6.pdf, Material="Thick Film", SCDType=spec, Supplier 1=Digi-Key
R8: library part RES_3K3_0402_5%, "Resistor SMD chip 20k Ohm 0.063W 5% 0402", Manufacturer 1=Yageo, Manufacturer Part Number 1=RC0402JR-073K3L, Package / Case="0402 (1005 metric)", Ratings="1/16 W", Supplier Part Number 1=311-3.3KJRCT-ND, Tolerance=±5%, ComponentLink1Description=http://www.yageo.com/documents/recent/PYu-RC0402_51_RoHS_L_6.pdf, ComponentLink1URL=http://www.yageo.com/documents/recent/PYu-RC0402_51_RoHS_L_6.pdf, Material="Thick Film", SCDType=spec, Supplier 1=Digi-Key
R9: library part RES_3K3_0402_5%, "Resistor SMD chip 2.4 MOhm 0.063W 5% 0402", Manufacturer 1=Yageo, Manufacturer Part Number 1=RC0402JR-073K3L, Package / Case="0402 (1005 metric)", Ratings="1/16 W", Supplier Part Number 1=311-3.3KJRCT-ND, Tolerance=±5%, ComponentLink1Description=http://www.yageo.com/documents/recent/PYu-RC0402_51_RoHS_L_6.pdf, ComponentLink1URL=http://www.yageo.com/documents/recent/PYu-RC0402_51_RoHS_L_6.pdf, Material="Thick Film", SCDType=spec, Supplier 1=Digi-Key
R10: library part RES_3K3_0402_5%, "Resistor SMD chip 7.5 MOhm 0.063W 5% 0402", Manufacturer 1=Yageo, Manufacturer Part Number 1=RC0402JR-073K3L, Package / Case="0402 (1005 metric)", Ratings="1/16 W", Supplier Part Number 1=311-3.3KJRCT-ND, Tolerance=±5%, ComponentLink1Description=http://www.yageo.com/documents/recent/PYu-RC0402_51_RoHS_L_6.pdf, ComponentLink1URL=http://www.yageo.com/documents/recent/PYu-RC0402_51_RoHS_L_6.pdf, Material="Thick Film", SCDType=spec, Supplier 1=Digi-Key
R11: library part RES_10K_0603_1%, "Resistor SMD chip 33k Ohm 0.1W 1% 0603", Manufacturer 1=Yageo, Manufacturer Part Number 1=RC0603FR-0710KL, Package / Case="0603 (1608 Metric)", Ratings=1/10W, Supplier Part Number 1=311-10.0KHRCT-ND, Tolerance=±1%, SCDType=spec, Supplier 1=Digi-Key
R12: library part RES_10K_0603_1%, "Resistor SMD chip 68k Ohm 0.1W 1% 0603", Manufacturer 1=Yageo, Manufacturer Part Number 1=RC0603FR-0710KL, Package / Case="0603 (1608 Metric)", Ratings=1/10W, Supplier Part Number 1=311-10.0KHRCT-ND, Tolerance=±1%, SCDType=spec, Supplier 1=Digi-Key
U1: "AMS AS7341 / 11-Channel Spectral Sensor Frontend"
U3: "Micropower, 3-Axis, +/-2 g / +/-4 g / +/-8 g Digital Output MEMS Accelerometer with 200 Hz BW, Industrial, 16-pin LGA, Reel", Manufacturer="Analog Devices", Supplier Part Number 1=ADXL362BCCZ-R2TR-ND, Supply Current="1.8 uA", Voltage Supply (V)="1.6 to 3.5", # of Axes=3, -3dB Bandwidth="200 Hz", ComponentLink1Description="Manufacturer URL", ComponentLink1URL=http://www.analog.com/en/index.html, ComponentLink2Description=Datasheet, ComponentLink2URL=http://www.analog.com/static/imported-files/data_sheets/ADXL362.pdf, ComponentLink3Description="Package Specification", ComponentLink3URL=http:/www.analog.com/static/imported-files/packages/PKG_PDF/LGA(CC)/CC_16_4.pdf, ComponentLink4Description="Product URL", ComponentLink4URL=http://www.analog.com/en/mems-sensors/mems-inertial-sensors/adxl362/products/product.html, DatasheetVersion="Rev. B", Mounting Technology="Surface Mount", Output Type=Digital, PackageDescription="16-Pin Land Grid Array, 3.25 x 3 mm Body, 0.5 mm Pitch", PackageReference=CC-16-4, PackageVersion="10-23-2012-A, 10/2012", Packing=Reel, PartNumber=ADXL362BCCZ-R2, Sensitivity="1/2/4 mg/LSB", Supplier 1=Digi-Key, Supplier 2=Digi-Key, Supplier 3=Digi-Key, Supplier 4=Newark, Supplier 5=Mouser, Supplier Part Number 2=ADXL362BCCZ-R2CT-ND, Supplier Part Number 3=ADXL362BCCZ-R2DKR-ND, Supplier Part Number 4=45W7058, Supplier Part Number 5=584-ADXL362BCCZ-R2
U4: "Single Output LDO, 150 mA, Fixed 1.8 V Output, 2.7 to 10 V Input, with Low IQ, 5-pin SOT-23 (DBV), -40 to 125 degC, Green (RoHS & no Sb/Br)", Manufacturer="Texas Instruments", Supplier Part Number 1=296-2700-2-ND, Accuracy(%)=3, Code_JEDEC=MO-178, ComponentLink1Description="Manufacturer URL", ComponentLink1URL=http://www.ti.com/, ComponentLink2Description=Datasheet, ComponentLink2URL=http://www.ti.com/general/docs/lit/getliterature.tsp?genericPartNumber=TPS76318&fileType=pdf, ComponentLink3Description="Package Specification", ComponentLink3URL=http://www.ti.com/litv/pdf/mpds018i, DatasheetVersion=SLVS181H, Eco-Plan="Green (RoHS & no Sb/Br)", Fixed Output Options(V)=1.8, Iout(Max)(A)=0.15, Iq(Typ)(mA)=0.08, Mounting Technology="Surface Mount", PackageDescription="5-Pin Plastic Small Outline, Body 1.60 Ã— 2.90 mm, Pitch 0.95 mm", PackageReference=DBV5, PackageVersion=4073253-4/K, PartNumber=TPS76318DBVT, SubFamily="Single Channel LDO", Supplier 1=Digi-Key, Supplier 2=Digi-Key, Supplier 3=Digi-Key, Supplier 4=Farnell, Supplier 5=Farnell, Supplier 6=Newark, Supplier 7=Mouser, Supplier Part Number 2=296-2700-1-ND, Supplier Part Number 3=296-2700-6-ND, Supplier Part Number 4=8461341RL, Supplier Part Number 5=8461341, Supplier Part Number 6=96C8608, Supplier Part Number 7=595-TPS76318DBVT, Vdo(Typ)(mV)=300, Vin(Max)(V)=10, Vin(Min)(V)=2.7, Vout Adj(Max)(V)=1.8, Vout Adj(Min)(V)=1.8
U5: "Simple, Miniature Single-Cell, Fully Integrated Li-Ion/Li-Polymer Charge Management Controller, 4.2V, 5-Pin SOT-23, Industrial Temperature, Tape and Reel", Manufacturer=Microchip, Supplier Part Number 1=MCP73812T-420I/OTTR-ND, Code_IPC=SOT23-5, ComponentLink1Description="Manufacturer URL", ComponentLink1URL=http://www.microchip.com/, ComponentLink2Description=Datasheet, ComponentLink2URL=http://ww1.microchip.com/downloads/en/DeviceDoc/22036b.pdf, ComponentLink3Description="Package Specification", ComponentLink3URL=http://www.microchip.com/stellent/groups/techpub_sg/documents/packagingspec/en012702.pdf, DatasheetVersion="revB, Sep-2007", Mounting Technology="Surface Mount", PackageDescription="5-Lead Plastic Small Outline Transistor (OT) [SOT-23]", PackageReference=SOT-23-OT5, PackageVersion="revBB, Aug-2009", PartNumber=MCP73812T-420I/OT, Supplier 1=Digi-Key, Supplier 2=Digi-Key, Supplier 3=Digi-Key, Supplier 4=Farnell, Supplier 5=Farnell, Supplier 6=Newark, Supplier 7=Mouser, Supplier Part Number 2=MCP73812T-420I/OTCT-ND, Supplier Part Number 3=MCP73812T-420I/OTDKR-ND, Supplier Part Number 4=1627187RL, Supplier Part Number 5=1627187, Supplier Part Number 6=27M0232, Supplier Part Number 7=579-MCP73812T-420IOT
U6: "Integrated Circuit", Manufacturer_Name="Maxim Integrated", Datasheet Link=https://pdfserv.maximintegrated.com/en/ds/MAX31889.pdf, Height=0.8mm, Manufacturer_Part_Number=MAX31889ALT+
U7: "Single Output LDO, 150 mA, Fixed 3.3 V Output, 2.7 to 10 V Input, with Low IQ, 5-pin SOT-23 (DBV), -40 to 125 degC, Green (RoHS & no Sb/Br)", Manufacturer="Texas Instruments", Supplier Part Number 1=296-2705-2-ND, Accuracy(%)=3, Code_JEDEC=MO-178, ComponentLink1Description="Manufacturer URL", ComponentLink1URL=http://www.ti.com/, ComponentLink2Description=Datasheet, ComponentLink2URL=http://www.ti.com/general/docs/lit/getliterature.tsp?genericPartNumber=TPS76333&fileType=pdf, ComponentLink3Description="Package Specification", ComponentLink3URL=http://www.ti.com/litv/pdf/mpds018i, DatasheetVersion=SLVS181H, Eco-Plan="Green (RoHS & no Sb/Br)", Fixed Output Options(V)=3.3, Iout(Max)(A)=0.15, Iq(Typ)(mA)=0.08, Mounting Technology="Surface Mount", PackageDescription="5-Pin Plastic Small Outline, Body 1.60 Ã— 2.90 mm, Pitch 0.95 mm", PackageReference=DBV5, PackageVersion=4073253-4/K, PartNumber=TPS76333DBVT, SubFamily="Single Channel LDO", Supplier 1=Digi-Key, Supplier 2=Digi-Key, Supplier 3=Digi-Key, Supplier 4=Farnell, Supplier 5=Farnell, Supplier 6=Newark, Supplier 7=Mouser, Supplier Part Number 2=296-2705-1-ND, Supplier Part Number 3=296-2705-6-ND, Supplier Part Number 4=8461376, Supplier Part Number 5=8461376RL, Supplier Part Number 6=96C8605, Supplier Part Number 7=595-TPS76333DBVT, Vdo(Typ)(mV)=300, Vin(Max)(V)=10, Vin(Min)(V)=2.7, Vout Adj(Max)(V)=3.3, Vout Adj(Min)(V)=3.3

## Free pads (board coordinates)
  round 1.8 hole 1.8: 2(129.95,70.075)
  oval 2.4x2.3 hole 2.4: 2(130.075,50.025)
  round 2.4 hole 2.4: 2(150.125,69.975)

## Via types
v1: diameter 0.8, hole 0.4, Top Layer to Bottom Layer, tented bottom, 29 vias
v2: diameter 0.8, hole 0.4, Top Layer to Bottom Layer, tented both sides, 19 vias
v3: diameter 0.8, hole 0.4, Top Layer to Bottom Layer, 14 vias

## Nets (pads, with @x,y where several pads share a name; then routed paths per layer and width w, separated by ;. In a path a pad name is that pad's centre, name@x,y a point inside that pad or via, vN(x,y) a via of type N, cw(c..) or ccw(c..) an arc to the next point about the centre after c; other vN are vias at no path point)
1V8: C2.1 C6.1 U1.1 U4.5 | length 2.2
  Top Layer w0.5: C2.1 139.192,61.3 139.303,61.189 U1.1
3V3: C1.1 C7.1 C8.1 C10.1 C12.1 C13.1 C14.1 C15.1 J2.4 P1.6 R2.1 R3.1 R4.1 R5.1 U2.26 U3.1 U3.14 U6.6 U7.5 | length 23.6
  Top Layer w0.15: R3.1 138.45,63.425 141.625,63.425 R4.1 142.15,63.516 141.625,64.041 141.625,64.497 141.625,64.559 141.776,64.735 cw(c142.25,64.327) 142.25,64.952 143.325,64.952 cw(c143.325,64.327) 143.377,64.95 143.675,64.925 143.975,64.625 143.975,63.875 143.364,63.264 143.364,59.909 C1.1 ; 138.175,44.877 138.548,44.877 U3.14@138.55,44.875
  Top Layer w0.254: C7.1@136.725,44.6 137.815,44.6 138.092,44.877 138.175,44.877 ; C8.1@138.95,41.65 138.95,42.725 U3.1@139.073,42.848 ; C1.1@143.399,59.758 143.636,59.758 143.899,59.495 144.064,59.495 U2.26
  Top Layer w0.4: J2.4 J2.4@141,77.255 ; C14.1@149.125,74.525 C14.1 149.125,74.625 149.225,74.725 C13.1
  Bottom Layer w0.5: v3(153.873,67.177) 153.954,67.177 154.606,66.525 154.75,66.525 U7.5
ADXL_INT: U2.31 U3.11 | length 28.6
  Top Layer w0.15: U3.11@140.075,45.9 140.075,46.5
  Top Layer w0.254: v3(136.457,46.652) 136.732,46.652 137.004,46.925 139.65,46.925 140.075,46.5 ; v2(146.85,56.8) 147.219,57.169 147.219,57.445 U2.31
  Bottom Layer w0.254: v3(136.457,46.652) 136.457,47.216 137.491,48.25 146.2,48.25 149.995,52.045 149.995,52.255 146.85,55.4 v2(146.85,56.8)
ADXL_SPI_CS: U2.4 U3.8 | length 4.9
  Top Layer w0.15: U3.8@141.6,44.875 142.234,44.875
  Top Layer w0.254: 142.234,44.875 144.195,44.875 U2.4
ADXL_SPI_MISO: U2.3 U3.7 | length 5.5
  Top Layer w0.15: U3.7@141.6,44.375 141.615,44.36 142.311,44.36
  Top Layer w0.254: 142.311,44.36 144.71,44.36 146.353,46.003 U2.3
ADXL_SPI_MOSI: U2.2 U3.6 | length 6
  Top Layer w0.15: U3.6@141.6,43.875 142.2,43.875
  Top Layer w0.254: 142.2,43.875 144.827,43.875 145.377,44.425 145.867,44.425 U2.2
ADXL_SPI_SCLK: U2.38 U3.4 | length 33.5
  Top Layer w0.15: 140.575,42.175 U3.4@140.575,42.85
  Top Layer w0.254: 140.575,42.175 141.048,41.702 v3(142.282,41.702) ; v2(147.659,51.141) 147.87,51.141 148.105,50.905 U2.38
  Bottom Layer w0.254: v3(142.282,41.702) 138.898,41.702 138.38,42.22 137.315,42.22 137.094,42.441 137.094,43.506 135.375,45.225 135.375,47.125 137.2,48.95 146.15,48.95 146.321,49.121 146.321,49.802 v2(147.659,51.141)
AS_INT: R3.2 U1.7 U2.22 | length 7.9
  Top Layer w0.15: R3.2 140.046,61.778 140.046,60.83 140.209,60.668 140.288,60.668 140.567,60.389 U1.7 140.654,60.389 140.985,60.058 140.992,60.058 141.325,59.725 141.325,58.224 142.636,56.913 U2.22
AS_SCL: R5.2 U1.2 U2.21 | length 8.9
  Top Layer w0.15: U1.2 139.166,60.22 139.116,60.22 137.4,58.504 R5.2 138.913,57.9 139.891,56.922 141.333,56.922 U2.21
  Top Layer w0.254: U1.2 U1.2@139.452,60.506
AS_SDA: R4.2 U1.8 U2.23 | length 7
  Top Layer w0.15: R4.2 140.611,62.361 U1.8 140.78,61.02 140.83,61.02 141.625,60.225 141.625,58.752 U2.23
BAT: B1.3 SW1.1 | length 7.4
  Bottom Layer w0.5: B1.3 140.974,76.7 146.006,76.7 146.482,76.224 SW1.1
CC1: J1.3 R6.1 | length 2.8
  Top Layer w0.15: v1@128.748,58.207 129.782,58.207 R6.1
  Bottom Layer w0.15: J1.3 127.054,58.179 128.621,58.179 v1(128.65,58.207)
CC2: J1.9 R7.1 | length 2.9
  Top Layer w0.15: v1(128.65,61.225) 129.775,61.225 R7.1
  Bottom Layer w0.15: J1.9 127.063,61.188 128.612,61.188 v1(128.65,61.225)
CHRG_DETECT: R11.2 R12.1 U2.9 | length 20.8
  Top Layer w0.254: R11.2@130.44,52.04 131.498,53.098 131.907,53.098 R12.1 132.154,53.204 133.725,54.775 133.725,54.975 134.2,55.45 v1(134.2,56.5) ; U2.9 143.202,49.268 144.575,50.642 v2(144.575,50.725)
  Bottom Layer w0.254: v1(134.2,56.5) 136.212,56.5 141.987,50.725 144.025,50.725 144.1,50.65
GND: B1.2 C1.2 C2.2 C3.2 C4.2 C5.2 C6.2 C7.2 C8.2 C9.2 C10.2 C11.2 C12.2 C13.2 C14.2 C15.2 D1.K J1.1 J1.12 J2.6 J2.P1 J2.P2 J2.P3 J2.P4 J2.P5 P1.1 P2.6 R6.2 R7.2 R8.2 R10.2 R12.2 U1.3 U1.5 U2.1 U2.16 U2.27 U2.39 U3.12 U3.13 U3.16 U4.2 U5.2 U6.5 U7.2 | length 59.5
  Top Layer w0.15: U1.3 139.811,59.589 139.994,59.405 139.994,59.209 140.245,58.958 140.442,58.958 U1.5 ; v1@153.12,55.405 v1(153.334,55.619)
  Top Layer w0.18: D1.K D1.K@134.826,51.346 ; 138.025,43.875 138.55,43.875 138.563,43.888 138.971,43.888 139.7,44.617 139.7,44.725 139.075,45.35 139.075,45.9 U3.12@139.575,45.9 ; C1.2@144.566,61.111 C1.2 ; U2.27@145.04,59.579 U2.27
  Top Layer w0.254: R7.2 132.475,61.3 v1(133.075,60.7) 132.971,60.596 132.971,60.396 R6.2 ; R12.2 131.428,54.596 131.878,55.046 132.496,55.046 v1(132.6,55.15) v1@132.466,55.15 ; J2.P1 133.155,76.274 133.503,75.926 v2(134.334,75.926) ; J2.P3 133.255,65.62 133.871,66.236 v2(133.871,66.818) ; v3(133.326,43.119) 133.336,43.11 134.365,43.11 C15.2 ; v3(133.401,44.694) 134.781,44.694 C7.2 134.8,45.788 134.363,46.225 v3(134.363,46.5) ; D1.K@134.826,51.346 134.826,52.326 135.1,52.6 v1(135.1,52.875) ; C2.2 136.215,61.29 136.215,60.083 136.409,59.889 v1(136.409,59.741) ; v3(136.368,42.3) v3@136.632,42.3 ; J2.P4 137.575,64.315 v1(137.575,65.575) ; C8.2 137.8,41.65 137.25,41.65 137.15,41.75 137.15,41.782 v3@136.632,42.3 ; v1(137.856,51.852) 138.023,52.018 138.618,52.018 139.489,52.889 U2.16 ; 138.025,43.875 136.632,42.482 v3@136.632,42.3 ; v1(140.15,57.547) 140.15,57.704 140.611,58.165 U1.5 ; J2.6 143,76.071 143.297,75.774 v2(143.297,75.67) ; v1(144.225,62.225) 144.329,62.121 144.329,61.804 144.566,61.568 C1.2@144.566,61.111 ; C1.2@144.381,60.96 145.04,60.301 U2.27@145.04,59.579 ; J2.P5 145.391,64.351 v2(145.391,65.742) ; v3(145.979,43.513) U2.1@147.408,44.942 ; J2.P2 147.714,76.406 v1(148.879,76.406) ; v1(148.65,62.5) 148.691,62.5 148.741,62.45 U6.5 ; C14.2 149.165,73.535 149.165,72.521 v1(149.204,72.481) 149.3,72.481 149.744,72.925 C13.2 ; C10.2 149.875,59.35 150.446,58.779 150.771,58.779 v1(150.875,58.675) ; C9.2 R10.2 151.4,67.159 151.35,67.209 v3(151.35,67.25) ; U2.39 153.12,54.86 v1@153.12,55.405 ; C6.2 154.775,60.45 154.898,60.573 155.338,60.573 155.562,60.798 v3(155.604,60.798) ; v3(156.65,60.514) 156.744,60.42 157.206,60.42 C5.2 ; U4.2 157.423,63.702 157.92,63.702 158.176,63.446 v3(158.324,63.446)
  Bottom Layer w0.254: J1.1 J1.1@127.265,56.8 ; J1.12 J1.12@127.265,63 ; B1.2 140.15,60.318 v1(140.15,57.547)
NetD1_A: D1.A R1.1 | length 2.7
  Top Layer w0.254: D1.A 137.388,49.555
NetR1_2: R1.2 U2.13 | length 2.7
  Top Layer w0.254: 139.088,49.555 139.088,49.605 139.411,49.928 139.702,49.928 U2.13
NetR8_1: R8.1 U5.5 | length 1.9
  Bottom Layer w0.254: U5.5 154.85,59.795 R8.1@154.85,61.425
nRESET: P1.3 U2.7 | length 18
  Top Layer w0.254: P1.3 127.544,48.906 127.7,48.75 127.746,48.75 127.829,48.832 127.951,48.954 128.595,48.954 128.799,48.75 129.329,48.75 ccw(c130.075,50.025) 130.821,48.75 134.265,48.75 134.337,48.678 142.327,48.678 143.444,47.561 143.648,47.561 144.211,48.124 U2.7
SD_CLK: J2.5 U2.28 | length 19
  Top Layer w0.15: J2.5 141.9,70.95 143.45,69.4 v2(143.45,69.275) ; U2.28@146.637,60.125 v1@146.637,60.888
  Top Layer w0.254: U2.28 146.637,60.045 U2.28@146.637,60.125
  Bottom Layer w0.15: v2(143.45,69.275) 143.45,69.187 143.775,68.862 143.775,66.05 146.557,63.268 v1(146.557,61.093)
SD_CS: J2.2 U2.24 | length 22.3
  Top Layer w0.15: J2.2 138.6,70.35 v2(141.7,67.25) ; v2(142.25,64.327) 142.288,64.262 142.675,63.875 142.675,62.542 142.625,62.492 142.625,61.326 141.925,60.626 141.925,59.137 142.013,59.049 142.276,59.049 142.75,58.575 142.862,58.575 U2.24
  Bottom Layer w0.15: v2(141.7,67.25) 141.7,64.85 142.223,64.327 v2(142.25,64.327)
SD_DETECT: J2.DT U2.30 | length 7.4
  Top Layer w0.15: J2.DT 147.278,65.287 147.278,62.513 148.225,61.566 148.225,59.596 147.48,58.85 U2.30
SD_MISO: J2.7 U2.29 | length 19.2
  Top Layer w0.15: J2.7 144.1,69.325 v2(144.525,68.9) ; U2.29@147.25,59.675 v1@147.25,60.7
  Top Layer w0.254: U2.29 U2.29@147.037,59.296
  Bottom Layer w0.15: v2(144.525,68.9) 144.525,68.816 144.125,68.416 144.125,66.124 147.457,62.792 v1(147.457,60.718)
SD_MOSI: J2.3 U2.25 | length 21.7
  Top Layer w0.15: J2.3 139.75,77.005 139.75,70.475 v2@142.55,67.675 ; v2(143.325,64.327) 143.325,63.975 142.975,63.625 142.975,62.418 142.925,62.368 142.925,61.101 142.549,60.725 142.549,59.351 143.15,58.75 143.515,58.75 143.994,58.271 U2.25
  Bottom Layer w0.15: v2(142.65,67.775) 142.65,67.765 143.025,67.39 143.025,64.713 143.325,64.413 v2(143.325,64.327)
SWDCLK: P1.4 U2.6 | length 17.2
  Top Layer w0.254: P1.4 131.966,48.109 131.975,48.109 131.979,48.109 131.981,48.109 132.874,48.155 133.121,48.168 142.124,48.168 143.235,47.057 144.096,47.057 144.633,47.594 U2.6@144.748,47.594
SWDIO: P1.5 R2.2 U2.5 | length 17
  Top Layer w0.254: P1.5 129.556,47.664 131.708,47.664 132.196,47.664 141.915,47.664 143.026,46.553 144.653,46.553 145.163,47.063 U2.5
TEMP_SCL: U2.33 U6.2 | length 7.1
  Top Layer w0.15: U2.33 149.071,57.408 149.762,58.1 v1(149.762,58.233) ; v1(151.25,60.025) 151.25,60.932 150.701,61.482 150.701,62.118 150.882,62.3 151.263,62.3 U6.2
  Bottom Layer w0.15: v1(149.762,58.233) 149.762,58.409 149.94,58.586 149.94,58.954 150.886,59.901 151.126,59.901 v1(151.25,60.025)
TEMP_SDA: U2.34 U6.3 | length 8.4
  Top Layer w0.15: U2.34 149.601,56.651 150.15,57.2 150.176,57.226 v1(150.85,57.238) ; U6.3 151.563,62.95 151.944,62.95 152.188,62.705 v1(152.188,59.322)
  Bottom Layer w0.15: v1(150.85,57.238) 151.698,58.085 151.698,58.653 151.698,58.705 151.73,58.746 v1(152.188,59.322)
UART_CTS: P2.5 U2.18 | length 28.6
  Top Layer w0.254: P2.5 127.261,67.324 128.816,65.77 129.202,65.77 130.915,64.056 v1(130.915,63.909) ; U2.18 140.515,54.39 141.734,53.171 141.944,53.171 142.328,53.556 v2(142.601,53.556)
  Bottom Layer w0.254: v1(130.915,63.909) 130.915,63.85 131.438,63.327 131.438,63.147 132.773,61.812 133.253,61.812 134.087,60.978 134.087,59.65 140.181,53.556 v2(142.601,53.556)
UART_RTS: P2.4 U2.20 | length 28.4
  Top Layer w0.254: P2.4 128.159,67.77 131.538,64.391 131.538,64.174 132.398,63.314 132.536,63.314 133.1,62.75 v1(133.125,62.75) ; U2.20 141.744,55.619 142.195,55.168 143.692,55.168 v2(143.777,55.253)
  Bottom Layer w0.254: v1(133.125,62.75) 133.125,62.475 133.357,62.243 133.357,62.216 133.703,62.216 134.591,61.328 134.591,59.859 139.197,55.253 v2(143.777,55.253)
UART_RX: P2.2 U2.17 | length 38.2
  Top Layer w0.254: P2.2 130.098,73.478 130.098,73.052 135.325,67.825 135.325,66.624 135.2,66.499 v2(135.2,65.15) ; U2.17 141.981,52.032 v2(143.136,52.032)
  Bottom Layer w0.254: v2(135.2,65.15) 135.2,65.002 135.41,64.792 135.41,64.49 136.241,63.659 139.601,63.659 139.61,63.65 143.757,63.65 145.6,61.807 145.6,53.483 144.148,52.032 v2(143.136,52.032)
UART_TX: P2.3 U2.19 | length 35.5
  Top Layer w0.254: P2.3 128.936,72.602 128.936,70.897 128.773,70.734 128.773,69.252 132.403,65.622 132.403,63.88 132.565,63.718 134.292,63.718 134.81,63.2 v2(134.879,63.2) ; U2.19 141.871,54.263 142.18,54.572 143.021,54.572 143.356,54.237 144.441,54.237 v2(144.679,53.999)
  Bottom Layer w0.254: v2(134.879,63.2) 134.879,63.159 135.775,62.263 137.485,62.263 137.926,62.704 142.239,62.704 144.946,59.997 144.946,54.697 144.873,54.624 144.873,54.193 v2(144.679,53.999)
VBAT: C3.1 C5.1 C11.1 R9.1 SW1.2 U4.1 U4.3 U5.3 U7.1 U7.3 | length 33.8
  Top Layer w0.5: R9.1@152.725,66.275 R9.1 156.807,66.225 157.25,65.782 U4.3 ; U4.1 157.3,62.875 C5.1
  Bottom Layer w0.254: 157.093,55.957 157.093,57.738 U5.3 157.815,57.739
  Bottom Layer w0.35: U7.3@156.75,63.55 U7.3@156.85,63.45 ; U7.3 157.15,62.365 157.325,62.19 v3(157.325,62.175) 158.6,60.9 158.6,58.342 157.997,57.739 157.815,57.739
  Bottom Layer w0.5: SW1.2 152.694,70.897 152.78,70.81 152.694,70.723 152.694,64.661 152.987,64.368 153.5,64.368 ; v3(153.675,66.225) 153.675,64.543 153.5,64.368 ; U7.3@156.75,63.55 156.65,63.65 155.951,63.65 155.234,64.368 ; U7.3@156.85,63.45 157.1,63.45 U7.3 ; C11.1 157.1,65.35 U7.1 ; U7.1@157.302,65.35 157.202,65.25 156.35,65.25 155.468,64.368 155.234,64.368 ; 153.5,64.368 155.234,64.368
VBAT_POT: C9.1 R9.2 R10.1 U2.35 | length 13.5
  Top Layer w0.15: C9.1 R10.1 R9.2 152.925,65.075 v1(152.925,63.475) ; U2.35 150.303,56.114 150.823,56.403 v1(151.725,56.75) ; v1(152.802,58.467) 152.813,58.478 152.813,62.113 v1(152.85,62.15)
  Top Layer w0.254: C9.1 C9.1@150.062,65.237
  Bottom Layer w0.15: v1(151.725,56.75) 151.849,56.874 151.849,57.357 152.802,58.309 v1(152.802,58.467) ; v1(152.85,62.15) 152.887,62.188 152.887,63.437 v1(152.925,63.475)
VBUS: C4.1 J1.2 J1.11 P1.2 R11.1 U5.1 U5.4 | length 63.9
  Top Layer w0.254: R11.1@129.225,53.65 v1@129.225,55.425
  Bottom Layer w0.254: U5.4 154.721,57.739 154.919,57.541 C4.1@154.919,55.801 ; U5.1@157.042,59.587 U5.1
  Bottom Layer w0.35: U5.4@155.021,57.841 155.021,58.196 156.412,59.587 U5.1@157.042,59.587
  Bottom Layer w0.5: P1.2 129.225,52.721 v1@129.225,55.675 ; v1(129.325,55.675) 129.299,55.701 129.299,56.276 128.035,57.54 127.035,57.54 127.015,57.56 126.414,57.56 125.75,58.224 125.75,61.576 126.414,62.24 127.015,62.24 127.035,62.26 128.135,62.26 137.475,71.6 145.75,71.6 146.185,71.165 146.185,67.565 151.225,62.525 151.225,62.3 151.85,61.675 151.85,60.825 153.602,59.073 153.602,58.606 154.394,57.814 154.469,57.739 U5.4
pads on no net: B1.1 C1.0 C2.0 C3.0 C4.0 C5.0 C6.0 C7.0 C8.0 C9.0 C10.0 C11.0 C12.0 C13.0 C14.0 C15.0 D1.0 J1. J1.4 J1.5 J1.6 J1.7 J1.8 J1.10 J1.S1 J1.S2 J1.S3 J1.S4 J1.S5 J1.S6 J2.1 J2.8 J2.SW P2.1 R1.0 R2.0 R3.0 R4.0 R5.0 R6.0 R7.0 R8.0 R9.0 R10.0 R11.0 R12.0 U1.4 U1.6 U2.8 U2.10 U2.11 U2.12 U2.14 U2.15 U2.32 U2.36 U2.37 U3.2 U3.3 U3.5 U3.9 U3.10 U3.15 U4.4 U6.1 U6.4 U7.4

## Polygon pours and split planes (outlines as drawn)
3V3 on Top Layer "3V3" (solid, remove dead copper, pour order 1): 120.299,60.052 ccw(c139.926,60.052) 139.926,40.425 ccw(c139.926,60.052) 159.553,60.052 ccw(c139.926,60.052) 139.926,79.679 ccw(c139.926,60.052)
1V8 on Top Layer "1V8" (solid, remove dead copper, pour order 0): 156,59.95 156.175,60.125 156.175,64.225 149.075,64.225 148.6,64.7 148.6,67.05 145.025,67.05 143.625,65.65 141.475,65.65 140.1,66.8 136.725,66.8 136.05,66.125 136.05,62.3 136.05,62.225 135.525,62.225 135.35,62.05 135.55,61.85 135.55,59.825 142.325,59.825 142.4,59.9 142.4,64.725 147.35,64.725 148.9,63.396 152.017,63.383 152.125,59.95
GND on Bottom Layer "GND" (solid, remove dead copper, pour order 2): 120.299,60.052 ccw(c139.926,60.052) 139.926,40.425 ccw(c139.926,60.052) 159.553,60.052 ccw(c139.926,60.052) 139.926,79.679 ccw(c139.926,60.052)

## Other copper
Top Layer:
  pour cut-out: 156.273,50.577 157.225,49.625 157.225,49.303 151.354,42.996 149.787,44.563
Bottom Layer:
  pour cut-out: 150.148,44.202 151.1,43.25 151.422,43.25 157.729,49.121 156.162,50.688

## Silkscreen, mask and mechanical layers (free items; w line width, h text height)
Top Overlay:
  lines w0.254: 132.6,53.725 134.55,55.675 135.531,55.675 ; 134.8,54.9 136.15,56.25
  text "+" at 137.075,42.9 h1.2
Bottom Solder:
  region: 131.457,42.507 132.374,43.818 130.9,44.85 129.982,43.539
Mechanical 1:
  circle w0.254: c139.926,60.052 r19.627

## Text inside footprints (layer, text, board x,y; h text height)
J1: Mechanical 13 "PCB EDGE" at 121.175,65.4 h0.61 r270